# EAGLE board dimmer (EAGLE 6.4)
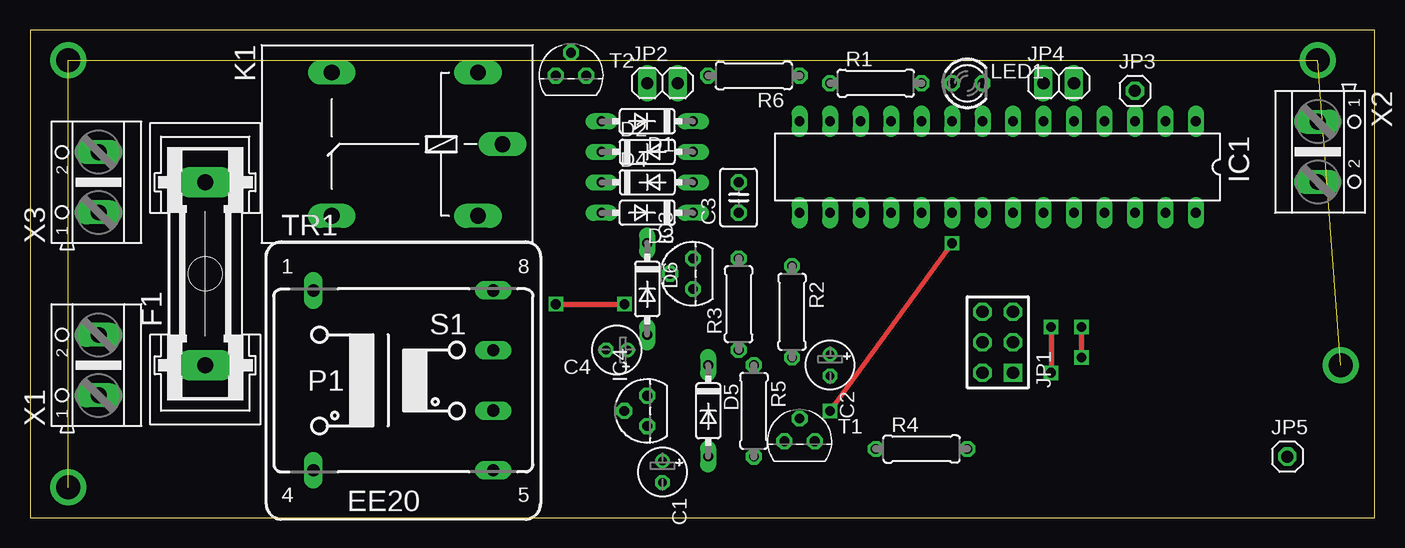
[diagram p0: board, top side]
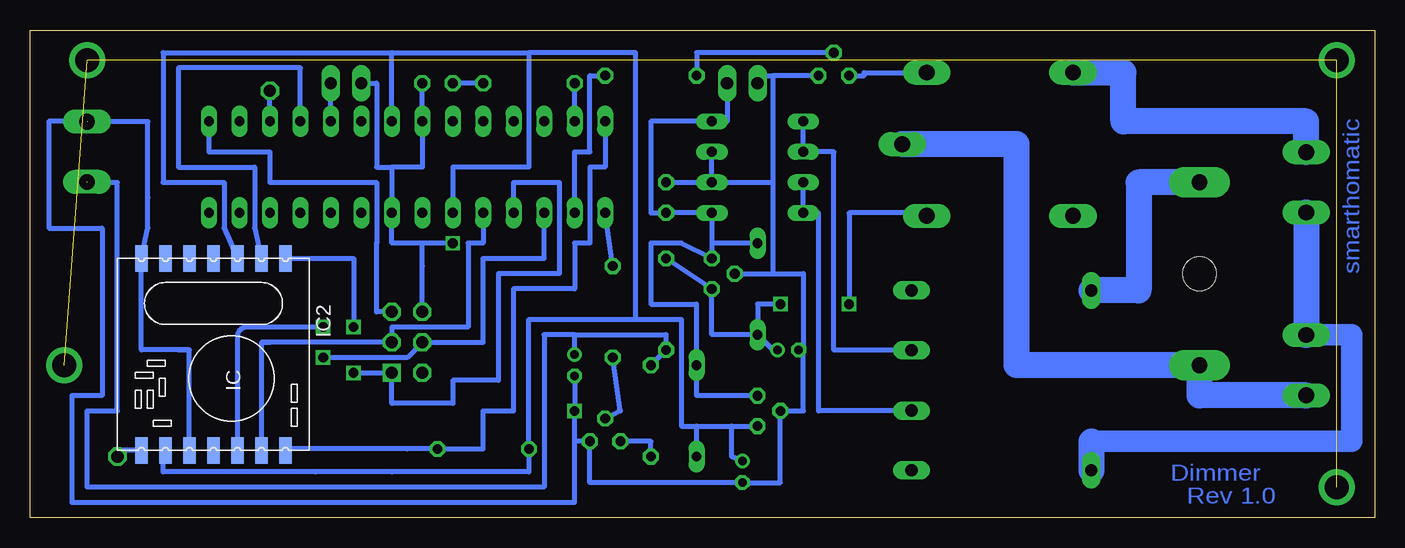
[diagram p1: board, bottom side, seen from below]

Size 112.06 x 40.63 mm. Coordinates in mm from the lower left corner, seen from the top.
Outline: 0,0 112.06,0 112.06,40.63 0,40.63 0,0
Copper layers (1*16): Top 0.035mm / dielectric 1.5mm / Bottom 0.035mm
Design rules "default": minimum track width 10mil, minimum drill 24mil, track to track 8mil, track to pad 8mil, pad to pad 8mil, via to via 8mil, smd to smd 8mil, copper to edge 40mil, drill to drill 8mil, minimum pad ring 10mil, minimum via ring 8mil, stop-mask expansion 4mil, vias tented up to drill 0mil, thermal gap 10mil

## Footprints (pad centres in the part's own frame; a part is rotated, then mirrored left to right if it is on the bottom)
E1,8-4 = drill 0.711 pad 1.168: + -0.889,0 | drill 0.711 pad 1.168 octagon: - 0.889,0
C025-030X050 = drill 0.813 octagon: 1 -1.27,0; 2 1.27,0
DO35-7 = drill 0.813 long: A 3.81,0; C -3.81,0
GSH15 = drill 1.321 pad 2.54 long: 1 -7.62,0; 2 7.62,0 | hole 2.794: 0,0
DIL28-3 = drill 0.813 long: 1 -16.51,-3.81; 2 -13.97,-3.81; 3 -11.43,-3.81; 4 -8.89,-3.81; 5 -6.35,-3.81; 6 -3.81,-3.81; 7 -1.27,-3.81; 8 1.27,-3.81; 9 3.81,-3.81; 10 6.35,-3.81; 11 8.89,-3.81; 12 11.43,-3.81; 13 13.97,-3.81; 14 16.51,-3.81; 15 16.51,3.81; 16 13.97,3.81; 17 11.43,3.81; 18 8.89,3.81; 19 6.35,3.81; 20 3.81,3.81; 21 1.27,3.81; 22 -1.27,3.81; 23 -3.81,3.81; 24 -6.35,3.81; 25 -8.89,3.81; 26 -11.43,3.81; 27 -13.97,3.81; 28 -16.51,3.81
RFM = smd 2.184 x 1.067: 1 0,14; 2 0,12; 3 0,10; 4 0,8; 5 0,6; 6 0,4; 7 0,2; 8 16,2; 9 16,4; 10 16,6; 11 16,8; 12 16,10; 13 16,12; 14 16,14
TO92 = drill 0.813 octagon: 1 -1.27,0; 2 0,1.905; 3 1.27,0
AVR-ISP-6 = drill 1.016 square: 1 -2.54,-1.27 | drill 1.016 octagon: 2 -2.54,1.27; 3 0,-1.27; 4 0,1.27; 5 2.54,-1.27; 6 2.54,1.27
1X02 = drill 1.016 long: 1 -1.27,0; 2 1.27,0
1X01 = drill 1.016 octagon: 1 0,0
G5LE = drill 1.321 long: 1 -7.493,-5.969; 2 -7.493,5.969; O 4.699,5.969; P -9.525,0; S 4.699,-5.969
LED3MM = drill 0.813 octagon: A -1.27,0; K 1.27,0
0207/7 = drill 0.813 octagon: 1 -3.81,0; 2 3.81,0
TO92' = drill 0.813 octagon: 1 1.27,0; 2 0,1.905; 3 -1.27,0
EE20-1 = drill 1.016 long: 1 -7.493,7.493; 4 -7.493,-7.493; 5 7.493,-7.493; 6 7.493,-2.515; 7 7.493,2.515; 8 7.493,7.493
AK500/2 = drill 1.321 long: 1 -2.515,0; 2 2.515,0

## Placement (x,y rotation side)
C1  10µ  [E1,8-4]  52.7,3.81 270 top
C2  100µ  [E1,8-4]  66.67,12.7 270 top
C3  220n  [C025-030X050]  59.06,26.67 90 top
C4  10µ  [E1,8-4]  48.89,13.97 180 top
D1  1N4148DO35-7  [DO35-7]  51.44,33.02 180 top
D2  1N4148DO35-7  [DO35-7]  51.44,30.48 0 top
D3  1N4148DO35-7  [DO35-7]  51.44,25.4 180 top
D4  1N4148DO35-7  [DO35-7]  51.44,27.94 0 top
D5  1N4148DO35-7  [DO35-7]  56.52,8.89 270 top
D6  1N4148DO35-7  [DO35-7]  51.44,19.05 270 top
F1  F50mA  [GSH15]  14.61,20.32 90 top
IC1  MEGA48/88/168-PU  [DIL28-3]  80.65,29.21 180 top
IC2  RFM12  [RFM]  104.78,21.59 270 bottom
IC3  7812L  [TO92]  55.25,20.32 90 top
IC4  LP2950Z  [TO92]  51.44,8.89 90 top
JP1  AVR-ISP-6  [AVR-ISP-6]  80.65,14.61 90 top
JP2  POWER  [1X02]  52.7,36.2 0 top
JP3  TX  [1X01]  92.08,35.56 0 top
JP4  On/Off  [1X02]  85.73,36.2 0 top
JP5  ANT  [1X01]  104.78,5.08 0 top
K1  G5LE  [G5LE]  29.84,31.11 180 top
LED1  2mA  [LED3MM]  78.11,36.2 0 top
R1  680R  [0207/7]  70.48,36.2 0 top
R2  1k  [0207/7]  63.5,17.14 270 top
R3  1k2  [0207/7]  59.06,17.78 90 top
R4  1M  [0207/7]  74.3,5.71 0 top
R5  100R  [0207/7]  60.33,8.89 270 top
R6  1k  [0207/7]  60.33,36.83 180 top
T1  BC547  [TO92']  64.14,6.35 0 top
T2  BC547  [TO92']  45.08,36.83 0 top
TR1  12V  [EE20-1]  31.11,11.43 0 top
X1  AC In  [AK500/2]  5.71,12.7 90 top
X2  DIM Out  [AK500/2]  107.31,30.48 270 top
X3  AC Out  [AK500/2]  5.71,27.94 90 top

## Library data of the parts
C1-C4 R1-R6 = rcl
D1-D6 = diode
F1 = fuse; MPN: 64900001039; OC_FARNELL: 1271673; OC_NEWARK: 02P0318
IC1 JP1 = avr-5-4.16
IC2 = hopeRF
IC3 IC4 = linear
JP2-JP5 = pinhead
K1 = relay; OC_FARNELL: unknown; OC_NEWARK: unknown
LED1 = led
T1 T2 = transistor
TR1 = trafo
X1-X3 = con-ptr500; OC_FARNELL: unknown; OC_NEWARK: unknown

## Nets
GND: C1.- C2.- C3.2 C4.- D2.A D4.A IC1.8 IC1.22 IC2.7 IC2.10 IC3.2 IC4.2 JP1.6 JP2.1 JP4.1 LED1.K T1.1 T2.1 X2.1
N$1: D1.A D2.C TR1.7
N$2: R5.2 T1.3
N$3: IC1.17 IC2.12 JP1.4
N$4: IC1.18 IC2.1 JP1.1
N$5: IC1.19 IC2.13 JP1.3
N$6: IC1.13 R1.1
N$7: D3.A D4.C TR1.6
N$8: IC1.1 JP1.5
N$9: C3.1 D1.C D3.C D5.C D6.C IC3.3 IC4.3 JP2.2
N$10: C4.+ D6.A IC3.1 K1.2 R3.2
N$11: IC2.8 JP5.1
N$12: LED1.A R1.2
N$13: IC1.14 IC2.14 R4.2
N$14: IC1.15 R2.1
N$15: IC1.4 IC2.2
N$16: R2.2 T1.2
N$17: C2.+ R3.1 R5.1 X2.2
N$18: K1.1 T2.3
N$19: TR1.4 X1.2 X3.1
N$21: K1.S X3.2
N$22: F1.1 K1.P X1.1
N$23: F1.2 TR1.1
N$24: R6.2 T2.2
N$25: IC1.16 R6.1
N$26: IC1.3 JP3.1
N$27: IC1.5 JP4.2
VCC: C1.+ D5.A IC1.7 IC1.20 IC2.3 IC2.9 IC4.1 R4.1

## Tracks (layer width: path | path; a pad name or v marks a point on that pad's centre or on a via)
GND  (via drill 0.8)  (1 unrouted)
  Top 0.406: v66.67,8.89 v76.84,22.86
  Bottom 0.406: D4.A D2.A | 79.38,20.95 JP1.6 79.38,20.95 | 79.38,20.95 79.38,22.86 | 79.38,22.86 80.65,22.86 81.92,22.86 IC1.22 81.92,29.21 | 81.92,29.21 79.38,29.21 IC1.8 LED1.K | IC2.10 98.78,13.97 | 98.78,13.97 99.7,13.97 98.78,13.97 | 98.78,13.97 102.78,13.97 IC2.7 102.23,24.13 102.23,26.67 102.23,32.99 X2.1 | 79.38,20.95 79.38,22.86 | C2.- v66.67,8.89 66.67,6.35 | 47.62,13.97 47.62,8.89 IC4.2 49.53,2.92 C1.- 65.41,2.92 T1.1 66.67,6.35 | 47.62,13.97 C4.- | IC3.2 50.17,20.32 | 50.17,20.32 47.62,20.32 47.62,13.97 | D4.A 50.17,27.94 | 50.17,27.94 50.17,20.32 | T2.1 50.17,36.83 | 50.17,36.83 50.17,27.94 | C3.2 D4.A | 107.31,33.02 110.49,33.02 110.49,24.13 106.05,24.13 106.05,10.16 108.59,10.16 108.59,1.27 66.67,1.27 66.67,6.35 | JP2.1 51.44,36.83 50.17,36.83 | JP4.1 83.19,36.2 83.19,29.21 81.92,29.21 | v76.84,22.86 79.38,22.86
N$1
  Bottom 0.406: TR1.7 45.08,13.95 45.08,30.48 D2.C D1.A
N$2
  Bottom 0.406: R5.2 60.33,6.35 T1.3
N$3  (via drill 0.8)
  Top 0.406: v87.63,13.34 v87.63,15.88
  Bottom 0.406: IC1.17 69.22,21.59 74.3,21.59 74.3,14.61 JP1.4 80.65,13.34 v87.63,13.34 | v87.63,15.88 93.98,15.88 arc-90 94.78,15.08 IC2.12
N$4  (via drill 0.8)
  Top 0.406: v85.09,15.88 v85.09,12.06
  Bottom 0.406: IC1.18 71.76,27.94 67.94,27.94 67.94,20.32 73.03,20.32 73.03,11.43 76.84,11.43 76.84,9.53 81.92,9.53 JP1.1 v85.09,12.06 | IC2.1 85.09,21.59 v85.09,15.88
N$5
  Bottom 0.406: IC1.19 74.3,22.86 75.56,22.86 75.56,15.88 81.92,15.88 JP1.3 92.08,14.61 | 92.08,14.61 92.78,14.61 | 92.78,14.61 92.08,14.61 | 92.08,14.61 92.78,14.61 | 92.78,14.61 92.08,14.61 | 92.08,14.61 92.78,14.61 | 92.78,14.61 IC2.13
N$6
  Bottom 0.406: IC1.13 R1.1
N$7
  Bottom 0.406: TR1.6 38.73,8.91 46.36,8.89 46.36,25.4 D3.A D4.C
N$8
  Bottom 0.406: IC1.1 97.16,30.48 92.08,30.48 92.08,27.94 83.19,27.94 83.19,22.86 83.19,17.14 JP1.5
N$9
  Bottom 0.406: D6.C 55.25,22.86 | 55.25,22.86 IC3.3 57.78,22.86 59.06,22.86 60.33,22.86 60.33,17.78 56.52,17.78 D5.C 56.52,10.16 IC4.3 | 55.25,22.86 D3.C C3.1 60.33,25.4 60.33,33.02 D1.C 53.97,33.02 JP2.2
N$10  (via drill 0.8)
  Top 0.406: v43.81,17.78 v49.53,17.78
  Bottom 0.406: R3.2 IC3.1 55.25,15.24 D6.A | C4.+ 50.17,13.97 D6.A | K1.2 37.34,25.4 43.81,25.4 v43.81,17.78 | v49.53,17.78 51.44,17.78 D6.A
N$11
  Bottom 0.406: IC2.8 104.78,5.59 JP5.1
N$12
  Bottom 0.406: R1.2 LED1.A
N$13
  Bottom 0.406: IC1.14 64.14,29.21 65.41,29.21 65.41,22.86 66.67,22.86 66.67,19.05 71.76,19.05 71.76,8.89 74.3,8.89 74.3,5.71 R4.2 80.65,5.71 90.81,5.71 90.81,5.62 IC2.14
N$14
  Bottom 0.406: R2.1 IC1.15
N$15
  Bottom 0.406: IC1.4 89.53,37.47 99.7,37.47 99.7,29.21 93.34,29.21 93.34,24.13 IC2.2
N$16
  Bottom 0.406: T1.2 62.86,8.89 R2.2
N$17  (1 unrouted)
  Bottom 0.406: R5.1 R3.1 59.06,15.24 66.67,15.24 | C2.+ 66.67,15.24 | 66.67,15.24 69.22,15.24 69.22,2.54 107.31,2.54 107.31,8.89 104.78,8.89 104.78,27.94 106.05,27.94 107.31,27.94
N$18
  Bottom 0.406: T2.3 42.55,36.83 42.55,37.08 K1.1
N$19
  Bottom 1.778: X1.2 1.9,15.21 1.9,6.35 23.62,6.35
  Bottom 2.184: X3.1 X1.2 | 23.62,6.35 TR1.4
N$20  (via drill 2)  (3 unrouted)
  other vias: 3.17,38.1 3.17,2.54 107.31,38.1 109.22,12.7
N$21
  Bottom 2.184: X3.2 5.71,33.02 20.95,33.02 20.95,37.08 K1.S
N$22
  Bottom 2.184: X1.1 14.61,10.19 F1.1 29.84,12.7 29.84,31.11 K1.P
N$23
  Bottom 2.184: F1.2 19.69,27.94 19.69,18.92 TR1.1
N$24
  Bottom 0.406: T2.2 56.52,38.73 R6.2
N$25
  Bottom 0.406: IC1.16 66.67,30.48 65.41,30.48 65.41,36.83 R6.1
N$26
  Bottom 0.406: IC1.3 JP3.1
N$27
  Bottom 0.406: IC1.5 JP4.2
VCC
  Bottom 0.406: C1.+ 53.59,5.08 53.59,7.62 | 53.59,7.62 IC4.1 | IC1.7 81.92,38.73 | 81.92,38.73 70.48,38.73 | 70.48,38.73 70.48,36.83 | 70.48,36.83 70.48,29.21 76.84,29.21 IC1.20 | IC2.9 100.97,5.4 100.97,3.81 88.27,3.81 81.92,3.81 70.48,3.81 R4.1 70.48,16.51 61.59,16.51 | 61.59,16.51 57.78,16.51 57.78,7.62 56.52,7.62 | 56.52,7.62 53.59,7.62 | D5.A 56.52,7.62 | 61.59,16.51 61.59,38.73 70.48,38.73 | 70.48,38.73 70.48,36.83 | 81.92,38.73 100.97,38.73 100.97,27.94 95.89,27.94 95.89,24.13 IC2.3

## Text on the board
Bottom: smarthomatic | Dimmer | Rev 1.0